# Altium PCB IMX6WBED.PcbDoc (part 3 of 10)
Units mil, origin at the board's own origin, x right, y up, seen from the top; angles counter-clockwise.
Board outline 3318.23 x 4815.16 mil, 6 copper layers (Top Layer, L2_GND_1, L3_INT_1, L6_INT_2, L7_PWR_2, Bottom Layer), stack 27.7 mil thick; 504 components, 400 nets, 2357 pads, 1199 vias.
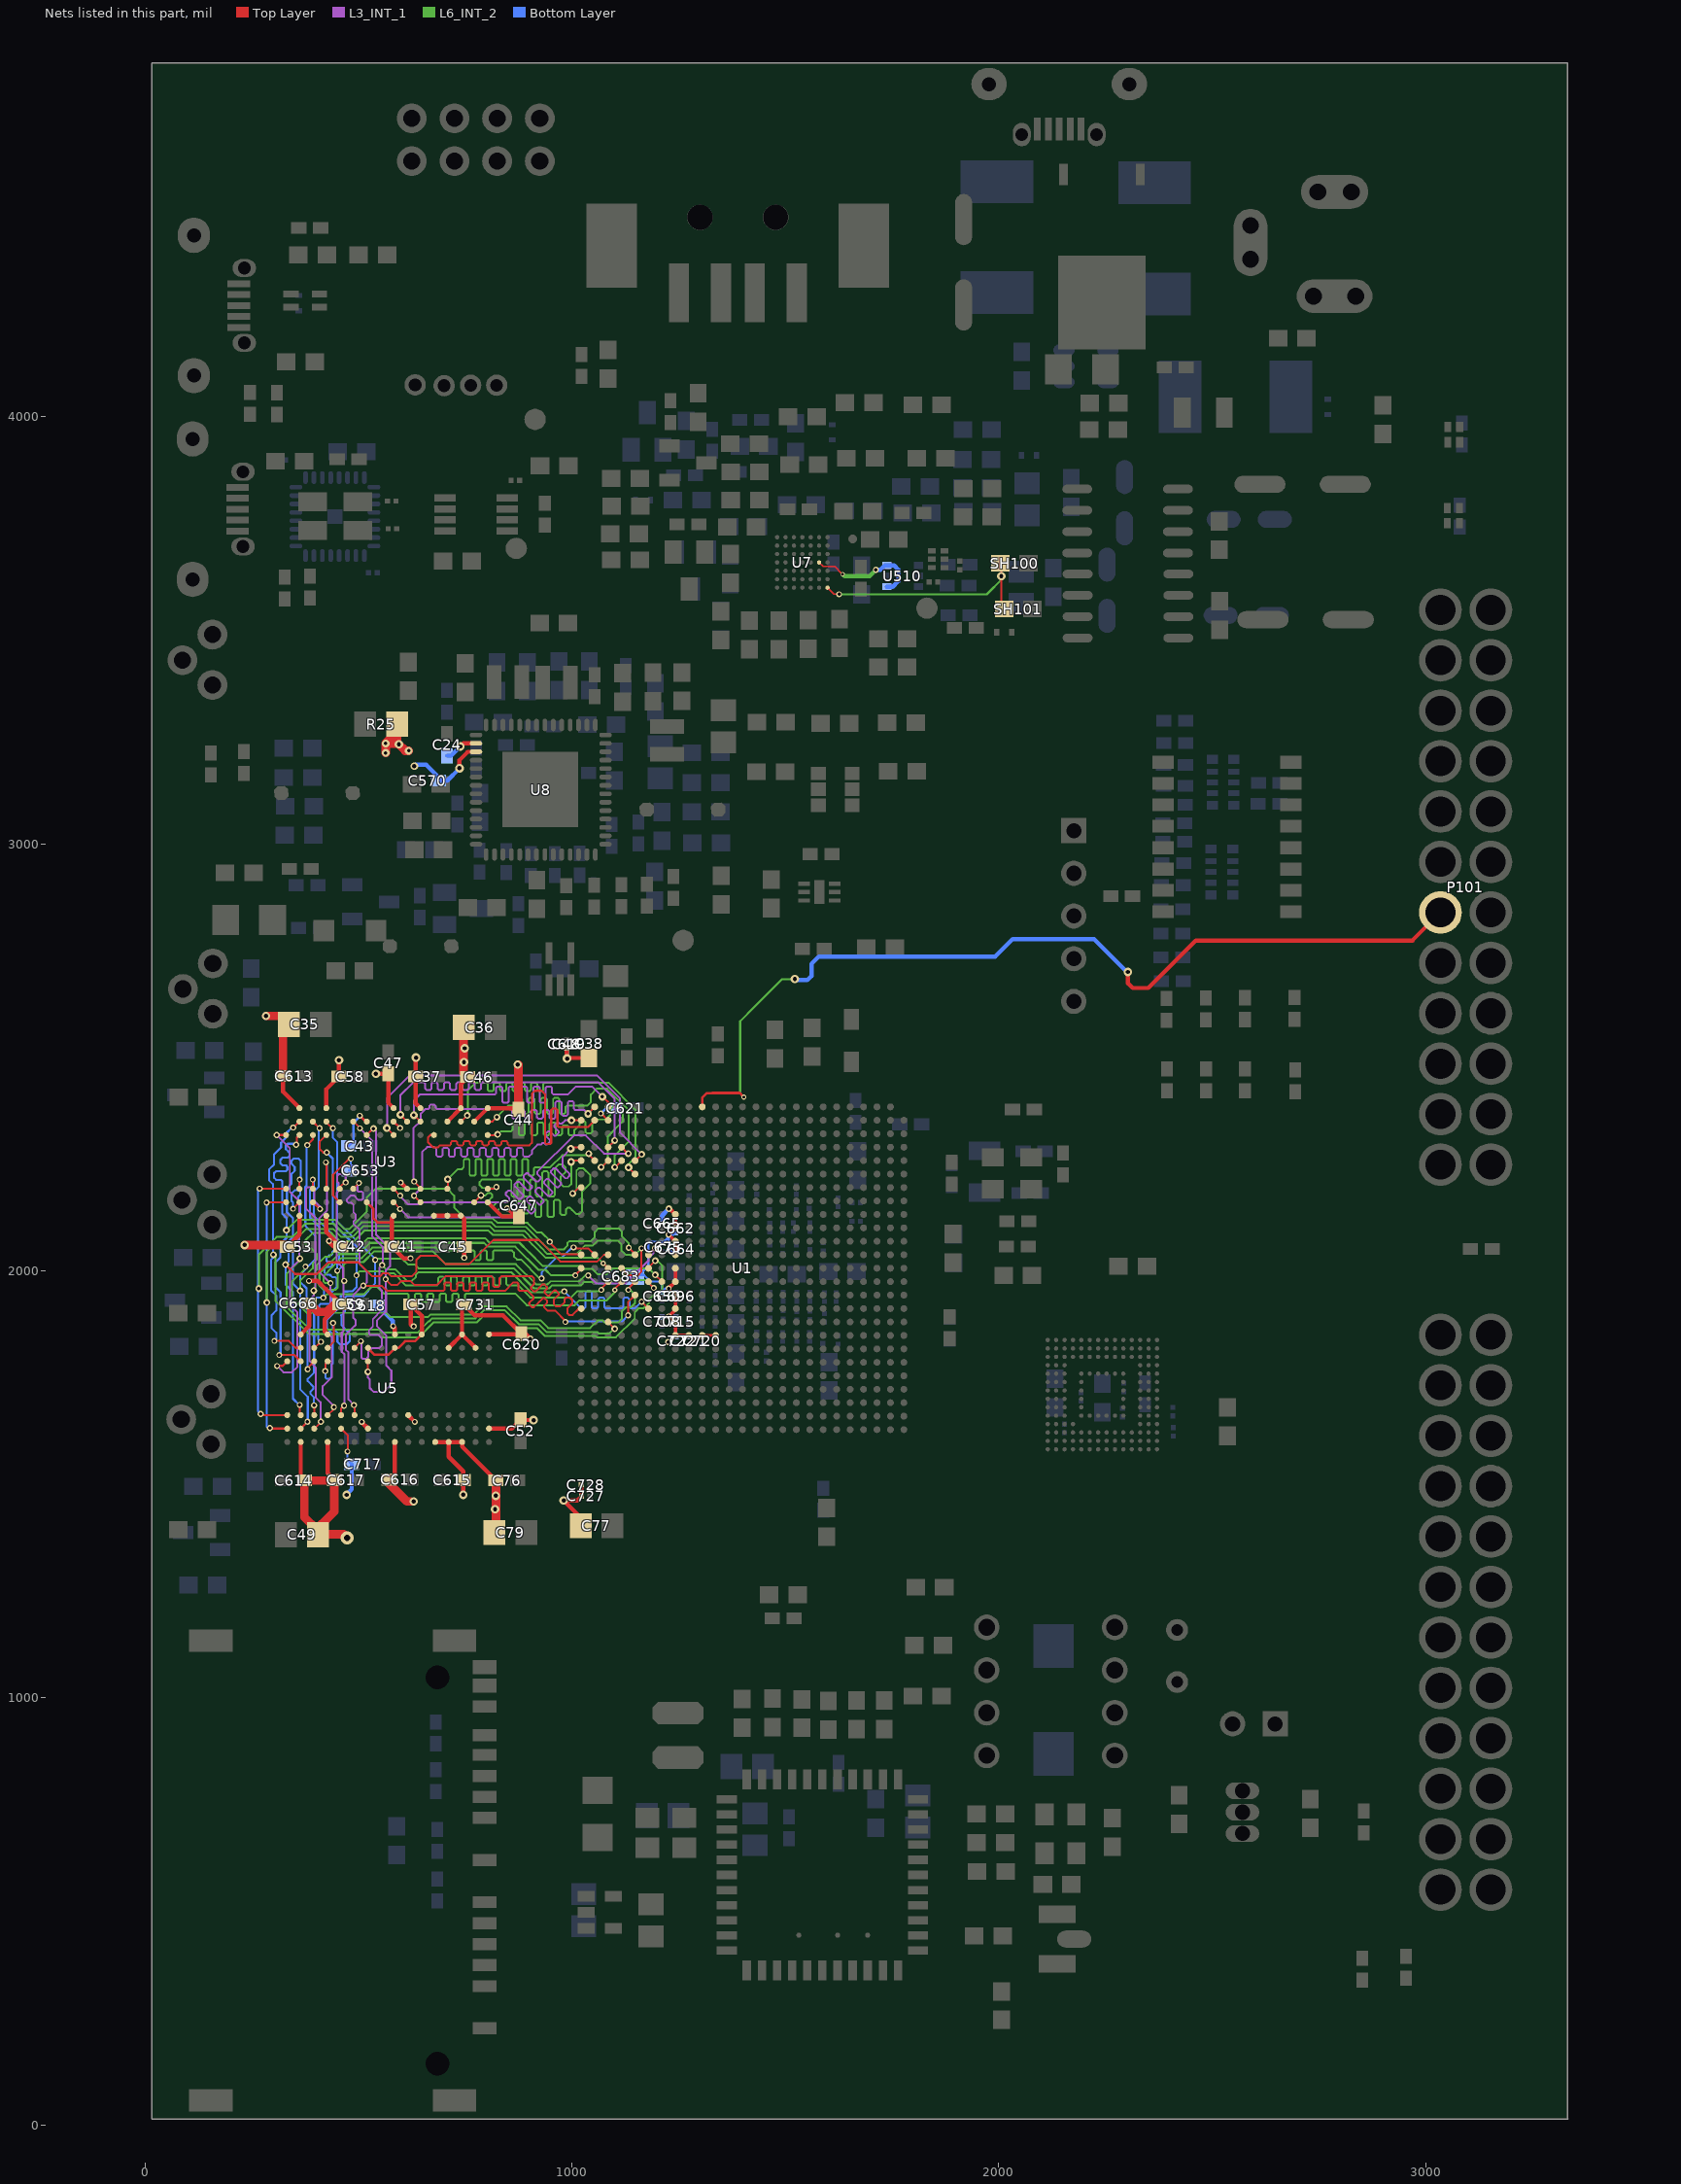
[diagram p7: the nets of this part, all layers, seen from the top]

## Via types
v1: diameter 14, hole 8, Top Layer to Bottom Layer, 296 vias
v2: diameter 14, hole 8, Top Layer to Bottom Layer, tented both sides, 244 vias
v3: diameter 20, hole 10, Top Layer to Bottom Layer, 221 vias
v4: diameter 20, hole 10, Top Layer to Bottom Layer, tented both sides, 112 vias
v5: diameter 18, hole 8, Top Layer to Bottom Layer, tented both sides, 74 vias
v6: diameter 12, hole 6, Top Layer to Bottom Layer, tented both sides, 60 vias
v7: diameter 16, hole 8, Top Layer to Bottom Layer, 59 vias
v8: diameter 30, hole 15, Top Layer to Bottom Layer, 33 vias
v9: diameter 40, hole 20, Top Layer to Bottom Layer, 16 vias
v10: diameter 30, hole 15, Top Layer to Bottom Layer, tented both sides, 16 vias
v11: diameter 18, hole 8, Top Layer to Bottom Layer, 16 vias
v12: diameter 12, hole 6, Top Layer to Bottom Layer, 13 vias
v13: diameter 16, hole 8, Top Layer to Bottom Layer, tented both sides, 8 vias
v14: diameter 80, hole 40, Top Layer to Bottom Layer, 5 vias
v15: diameter 14, hole 6, Top Layer to Bottom Layer, tented both sides, 4 vias
v16: diameter 50, hole 30, Top Layer to Bottom Layer, 3 vias
v17: diameter 16, hole 10, Top Layer to Bottom Layer, 3 vias
v18: diameter 25, hole 15, Top Layer to Bottom Layer, tented both sides, 3 vias
v19: diameter 35, hole 20, Top Layer to Bottom Layer, tented both sides, 3 vias
v20: diameter 10, hole 6, Top Layer to Bottom Layer, 3 vias
v21: diameter 18, hole 10, Top Layer to Bottom Layer, tented both sides, 2 vias
v22: diameter 80, hole 45, Top Layer to Bottom Layer, 1 vias
v23: diameter 40, hole 20, Top Layer to Bottom Layer, tented both sides, 1 vias
v24: diameter 11, hole 6, Top Layer to Bottom Layer, tented both sides, 1 vias
v25: diameter 13, hole 6, Top Layer to Bottom Layer, tented both sides, 1 vias
v26: diameter 14, hole 6, Top Layer to Bottom Layer, 1 vias

## Nets (pads, with @x,y where several pads share a name; then routed paths per layer and width w, separated by ;. In a path a pad name is that pad's centre, name@x,y a point inside that pad or via, vN(x,y) a via of type N, cw(c..) or ccw(c..) an arc to the next point about the centre after c; other vN are vias at no path point) (continued)
DDR_1V5: C24.2 C35.2 C36.2 C37.2 C38.2 C41.2 C42.2 C43.2 C44.2 C45.2 C46.2 C48.2 C49.2 C52.2 C53.2 C57.2 C58.2 C59.2 C76.2 C77.2 C79.2 C613.2 C614.2 C615.2 C616.2 C617.2 C619.2 C620.2 C647.2 C650.2 C662.2 C664.2 C665.2 C666.2 C675.2 C683.2 C696.2 C708.2 C715.2 C720.2 C721.2 C722.2 C727.2 C728.2 C731.2 R25.2 U1.R18 U1.T18 U1.U18 U1.V9 U1.V10 U1.V11 U1.V12 U1.V13 U1.V14 U1.V15 U1.V16 U1.V17 U1.V18 U3.A1 U3.A8 U3.B2 U3.C1 U3.C9 U3.D2 U3.D9 U3.E9 U3.F1 U3.G7 U3.H2 U3.H9 U3.K2 U3.K8 U3.N1 U3.N9 U3.R1 U3.R9 U5.A1 U5.A8 U5.B2 U5.C1 U5.C9 U5.D2 U5.D9 U5.E9 U5.F1 U5.G7 U5.H2 U5.H9 U5.K2 U5.K8 U5.N1 U5.N9 U5.R1 U5.R9 U8.30 | length 5853.5
  Top Layer w5: v1(1226.19,1958.8) U1.V15@1242.04,1942.96
  Top Layer w6: v1(502.81,2363.06) 516.47,2349.4 U3.K2@519.01,2349.4 ; U3.K8@519.01,2160.43 534.71,2144.72 534.71,2122.77 544.33,2113.15 577.88,2113.15 ; U5.K2@522.01,1819.4 538.01,1803.4 568.99,1803.4 U5.H2@585,1819.4 593.28,1819.4 608.83,1834.95 632.04,1834.95 U5.F1@647.99,1850.9 ; U3.H2@582,2349.4 v1@597.28,2334.12 ; U5.C1@742.36,1851.02 U5.C1@742.48,1850.9 ; U1.U18@1273.53,1848.47 v1@1285.53,1836.47 ; v1(1288.91,1837.93) 1288.91,1836.69 1289.13,1836.47 1293.03,1836.47 U1.T18@1305.03,1848.47 U1.R18@1336.53,1848.47
  Top Layer w8: v2(1225.12,1833.13) 1226.7,1833.13 U1.V18@1242.04,1848.47 ; v1(1226.19,1958.8) 1241.84,1974.45 U1.V14@1242.04,1974.45 U1.V13@1242.04,2005.95 ; U1.V18@1237.41,1848.47 U1.V18@1242.04,1848.47 ; U1.V15@1242.04,1942.96 U1.V16@1242.04,1911.46 1242.04,1908.51 v2(1226.72,1893.19) 1239.95,1879.96 U1.V17@1242.04,1879.96 U1.V18@1242.04,1848.47 ; U1.V12@1242.04,2043.23 U1.V12@1242.04,2037.44 U1.V11@1242.04,2068.94 v2(1226.29,2084.69) U1.V10@1242.04,2100.44 ; U1.U18@1273.53,1848.47 U1.V18@1242.04,1848.47
  Top Layer w10: C613.2@322.88,2455.9 322.88,2419.55 U3.R1@361.53,2380.9 ; C53.2@332.88,2055.9 361.53,2084.55 U3.R9@361.53,2128.93 ; U5.R9@364.53,1598.93 364.53,1517.43 C614.2@373.06,1508.9 ; U5.R1@364.53,1850.9 384.06,1870.43 C666.2@384.06,1923.9 ; v1@386.56,1976.67 403.67,1976.67 423.61,1956.73 423.81,1956.73 455.88,1924.66 C59.2@455.88,1921.9 420.58,1886.6 420.58,1857.84 U5.N1@427.52,1850.9 ; U3.N9@424.52,2128.93 424.52,2090.26 C42.2@457.88,2056.9 441.31,2056.9 v1@428.39,2069.82 ; U3.N1@424.52,2380.9 424.52,2425.54 C58.2@453.88,2454.9 453.88,2490.65 v3@454.19,2490.96 ; U5.N9@427.52,1598.93 427.52,1526.26 C617.2@443.88,1509.9 ; v1@506.42,1646.01 U5.K8@522.01,1630.43 ; C616.2@566.36,1506.39 585,1525.02 U5.H9@585,1598.93 ; U3.H9@582,2128.93 577.88,2124.81 577.88,2113.15 C41.2@577.88,2056.9 605.85,2028.93 v1@621.19,2028.93 ; v1@600.21,2205.49 613.49,2192.21 U3.G7@613.49,2191.92 ; U5.G7@616.49,1661.92 616.49,1661.41 v1(631.91,1645.99) ; v3@621.95,1459.83 v3(629.01,1459.83) ; v1@626.97,1868.9 621.88,1873.99 C57.2@621.88,1920.9 647.99,1894.79 U5.F1@647.99,1850.9 ; v3@634.57,2499.44 633.88,2498.75 C37.2@633.88,2454.9 633.88,2392.01 U3.F1@644.99,2380.9 ; U3.E9@676.49,2128.93 U3.D9@707.98,2128.93 U3.C9@739.48,2128.93 747.06,2121.35 C45.2@747.06,2055.9 v1@747.06,2034.83 ; U5.E9@679.49,1598.93 U5.D9@710.98,1598.93 ; U3.D2@707.98,2349.4 U3.C1@739.48,2380.9 739.48,2437.5 C46.2@755.88,2453.9 ; U5.D2@710.98,1819.4 U5.C1@742.48,1850.9 U5.B2@773.97,1819.4 ; v4(738.47,3227.9) 745.69,3235.12 U8.30@775.19,3235.12 ; U5.C1@742.36,1851.02 742.36,1916.38 C731.2@746.88,1920.9 772.43,1895.35 838.61,1895.35 C620.2@881.47,1852.49 ; v3@745.06,1474.22 C615.2@745.06,1509.9 745.06,1530.6 710.98,1564.68 U5.D9@710.98,1598.93 ; U3.B2@770.97,2349.4 U3.A1@802.47,2380.9 872.06,2380.9 C44.2@874.47,2378.49 ; U3.A8@802.47,2160.43 835.59,2127.31 C647.2@868.74,2127.31 ; U5.A8@805.47,1630.43 859.41,1630.43 C52.2@879.47,1650.49 v3@906.98,1650.49 ; U5.A1@805.47,1850.9 879.88,1850.9 C620.2@881.47,1852.49 ; C76.2@821.88,1508.9 742.48,1588.3 U5.C9@742.48,1598.93 U5.D9@710.98,1598.93 ; v1@850.85,2145.2 C647.2@868.74,2127.31 ; C647.2@875.47,2127.31 C647.2@868.74,2127.31 ; C620.2@891.11,1842.85 C620.2@881.47,1852.49 ; v1@902.21,1841.48 891.2,1852.49 C620.2@881.47,1852.49 ; C48.2@987.47,2520.9 v4@987.47,2497.9 ; v4(988.47,2496.9) v4@987.47,2497.9 ; C77.2@1020.07,1402.9 1020.07,1422.3 v4(980.47,1461.9) 1012.47,1461.9 C727.2@1022.47,1471.9 1021.47,1472.9 C728.2@1021.47,1498.9 ; C38.2@1039.47,2498.44 988.01,2498.44 v4@987.47,2497.9 ; v13(1226.67,2145.34) 1228.63,2145.34 U1.V9@1242.04,2131.93 U1.V10@1242.04,2100.44
  Top Layer w20: v3@233.25,2060.36 C53.2@328.42,2060.36 ; v4(283.16,2596.97) 317,2596.97 C35.2@337.07,2576.9 322.88,2562.71 C613.2@322.88,2455.9 ; C53.2@328.18,2060.6 C53.2@328.42,2060.36 ; C53.2@332.88,2055.9 C53.2@328.42,2060.36 ; C666.2@384.06,1923.9 404.47,1903.49 425.63,1903.49 444.04,1921.9 C59.2@455.88,1921.9 ; C49.2@401.29,1394.67 373.06,1422.9 C614.2@373.06,1508.9 C617.2@442.88,1508.9 ; C617.2@443.88,1509.9 C617.2@442.88,1508.9 ; v8@472.71,1375.43 465,1383.14 390.11,1383.14 442.88,1435.91 C617.2@442.88,1508.9 ; v5(563.47,3212.9) v5(563.47,3234.9) ; C616.2@566.36,1506.39 612.92,1459.83 v3@621.95,1459.83 ; v5(617.47,3217.9) 609.47,3217.9 v4(594.47,3232.9) ; C36.2@746.07,2569.9 746.07,2463.71 C46.2@755.88,2453.9 ; C79.2@818.07,1386.9 821.88,1390.71 C76.2@821.88,1508.9 ; C44.2@874.47,2378.49 v3@874.47,2482.37 ; v5(563.47,3234.9) 592.47,3234.9 v4(594.47,3232.9) ; v5(563.47,3234.9) 589.87,3261.3 R25.2@589.87,3279.9 589.87,3237.5 v4(594.47,3232.9)
  Bottom Layer w5: C683.2@1146.93,1990.9 C683.2@1161.62,1976.21 ; C683.2@1147.93,1991.9 1159.32,1991.9 1178.63,2011.21 1178.63,2063.05 1183.43,2067.85 1187.92,2067.85 ; C683.2@1157.42,1990.18 1168.76,1990.18 1184.34,1974.6 1203.93,1974.6 1210.47,1968.06 C650.2@1210.47,1949.9 1219.27,1958.7 v1@1226.29,1958.7 ; 1189.68,2067.85 1209.52,2067.85 C675.2@1212.47,2064.9 ; v1(1226.19,1958.8) v1@1226.29,1958.7 ; C696.2@1243.47,1949.9 1235.09,1949.9 v1@1226.29,1958.7
  Bottom Layer w6: C43.2@476.88,2291.9 488.25,2303.27 488.25,2347.34 v1@503.01,2362.1 ; C675.2@1212.47,2064.9 v2@1226.29,2078.72 ; v2@1228.89,1836.9 1235.66,1843.67 1242.24,1843.67 C722.2@1243.47,1844.9 C722.2@1240.98,1844.9 ; C662.2@1242.47,2088.9 1238.26,2084.69 v2(1226.29,2084.69) v2@1226.29,2078.72 ; C664.2@1243.47,2039.9 1238.77,2039.9 1226.29,2052.38 v2@1226.29,2078.72 ; C721.2@1273.47,1844.9 1283.68,1844.9 1288.66,1839.92 1294.64,1845.9 C720.2@1304.47,1845.9
  Bottom Layer w8: 1217.47,1890.9 v2@1224.43,1890.9 ; v2@1229.01,1890.9 C715.2@1243.47,1890.9
  Bottom Layer w10: C24.2@707.47,3206.31 716.88,3206.31 v4(738.47,3227.9) ; C619.2@987.47,2520.9 987.47,2497.9 v4(988.47,2496.9) ; C665.2@1211.49,2121.92 C665.2@1210.47,2120.9 1210.47,2129.14 v13(1226.67,2145.34)
  other v1: 507.27,1646.02 902.27,1841.46 629.05,1869.8 383.81,1976.14 621.68,2029.3 747.37,2030.42 430.58,2069.9 848.1,2146.24 598.89,2206.71 597.27,2334.4
  other v3: 819.63,1441.54 821.64,1473.1 745.04,1475.38 909.9,1650.11 232.78,2060.32 872.75,2483.07 746.8,2488.71 454.19,2493.14 634.34,2499.21 748.44,2520.98
  other v8: 473.2,1374.45
DDR_VREF: C47.2 C570.2 C618.2 C621.2 C653.2 C717.2 U1.AC2 U3.H1 U3.M8 U5.H1 U5.M8 U8.31 | length 786.5
  Top Layer w5: U3.M8@456.01,2160.43 440.13,2176.31 440.13,2224.94 476.45,2261.26 v1@481.73,2261.26 ; U5.M8@459.01,1630.43 474.78,1614.66 v1@474.78,1576.43 ; v1@1067.87,2369.09 U1.AC2@1084.56,2352.4
  Top Layer w10: v3@541.62,2460.8 542.13,2461.31 C47.2@569.47,2461.31 569.47,2393.43 U3.H1@582,2380.9 ; v1(580.76,1870.32) 585,1866.08 U5.H1@585,1850.9 ; v4(736.47,3176.9) 736.47,3196.04 755.86,3215.43 U8.31@775.19,3215.43
  Bottom Layer w5: v1(473.95,1576.71) 473.95,1556.83 C717.2@483.88,1546.9 ; C653.2@477.88,2234.9 481.96,2238.98 v1(481.96,2262.4) ; v1(1067.7,2368.37) 1080.23,2380.9 C621.2@1098.88,2380.9
  Bottom Layer w10: v3@472.79,1476.86 483.88,1487.95 C717.2@483.88,1546.9 ; C618.2@544.06,1918.9 580.4,1882.56 v1@580.4,1873.64 ; v21(630.47,3181.9) 633.4,3184.83 658.56,3184.83 687.06,3156.33 C570.2@687.06,3147.9 707.47,3147.9 v4(736.47,3176.9)
  other v3: 472.06,1475.16 540.59,2461.24
DHT11: P101.13 U1.T1 | length 2179.9
  Top Layer w6: U1.T1@1305.03,2383.9 1305.03,2405.46 1315.77,2416.2 1329.37,2416.2 ; 1329.42,2416.25 1393.12,2416.25 v6@1400.47,2408.9
  Top Layer w10: v3(2302.28,2699.77) 2302.28,2673.42 2313.52,2662.18 2350.17,2662.18 2461.62,2773.63 2968.86,2773.63 P101.13@3034.47,2839.24
  L6_INT_2 w4.7: v6(1402.47,2406.9) 1393.99,2415.38 1393.99,2584.48 1428.41,2618.9 1428.47,2618.9 1492.47,2682.9 v3@1522.7,2682.9
  Bottom Layer w10: v3(1521.93,2683.29) 1524.41,2680.81 1551.41,2680.81 1560.92,2690.32 1560.92,2718.49 1578.49,2736.06 1991.58,2736.06 2032.07,2776.55 2223.2,2776.55 2300.6,2699.15 v3@2301.04,2699.15
DMIC_DAT: SH100.2 SH101.2 U7.G1 | length 552.6
  Top Layer w3: U7.G1@1598.55,3599.9 1613.98,3584.47 v1@1625.44,3584.47
  Top Layer w5: SH100.2@2010.01,3656.9 2005.79,3652.68 v3(2005.79,3626.97) 2005.79,3556.12 SH101.2@2012.01,3549.9
  L6_INT_2 w5: v1(1625.74,3584.32) 1949.29,3584.32 1971.67,3584.32 2008.33,3620.98 2008.33,3630.41 v3@2007.78,3630.96
DMICCLK: U7.F4 U510.1 U510.3 | length 274.6
  Top Layer w3: U7.F4@1578.87,3658.94 1588.37,3649.44 1615.4,3649.44 v20@1632.91,3631.93
  L6_INT_2 w3: v20(1633.64,3631.73) v20@1635.02,3630.35 ; v1(1711.99,3641.59) v1@1713.67,3643.33
  L6_INT_2 w10: v20@1635.02,3630.35 1638.52,3626.85 1697.25,3626.85 v1(1711.99,3641.59)
  Bottom Layer w10: v1(1711.99,3641.59) 1722.35,3641.59 1732.66,3651.9 U510.3@1737.47,3651.9 1754.62,3651.9 1764.66,3641.86 1764.66,3615.23 1751.33,3601.9 U510.1@1737.47,3601.9
DRAM_A0: U1.AC14 U3.N3 U5.N3 | length 1558.6
  Top Layer w4.7: v1(422.02,1765.19) 422.02,1782.41 U5.N3@427.52,1787.91 U5.N3@427.57,1787.91 ; U3.N3@424.52,2317.91 408.7,2302.09 408.7,2285.47 417.3,2276.87 v1(425.34,2276.87) ; v2@1068.82,1958.71 U1.AC14@1084.56,1974.45
  L6_INT_2 w4.5: v1@492.09,1987.82 503,1998.73 556.17,1998.73 560.6,1994.3 581.96,1994.3 610.18,1966.08 684,1966.08 686.9,1968.98 686.9,1983.18 689.8,1986.08 698.5,1986.08 701.4,1983.18 701.4,1968.98 704.3,1966.08 713,1966.08 715.9,1968.98 715.9,1983.18 718.8,1986.08 727.5,1986.08 730.4,1983.18 730.4,1968.98 733.3,1966.08 742,1966.08 744.9,1968.98 744.9,1983.18 747.8,1986.08 756.5,1986.08 759.4,1983.18 759.4,1968.98 762.3,1966.08 771,1966.08 773.9,1968.98 773.9,1983.18 776.8,1986.08 785.5,1986.08 788.4,1983.18 788.4,1968.98 791.3,1966.08 800,1966.08 802.9,1968.98 802.9,1983.18 805.8,1986.08 814.5,1986.08 817.4,1983.18 817.4,1968.98 820.3,1966.08 829,1966.08 831.9,1968.98 831.9,1983.18 834.8,1986.08 843.5,1986.08 846.4,1983.18 846.4,1968.98 849.3,1966.08 873.36,1966.08 901.79,1937.65 976.94,1937.65 977.03,1937.74 998.12,1937.74 1012.66,1952.28 1064.38,1952.28 1066.25,1954.15 1066.25,1957.41 1068.32,1958.15 1068.82,1958.33 1069.09,1958.06 v2@1069.09,1957.19
  Bottom Layer w4.7: v1(422.02,1765.19) 422.02,1750.44 425.51,1746.95 431.99,1746.95 435.97,1750.93 435.97,1779.14 439.52,1782.69 439.52,1851.52 425.39,1865.65 425.39,1884.88 458.42,1917.91 458.42,1941.57 468.24,1951.39 474.82,1951.39 474.95,1951.52 485.01,1951.52 495.29,1961.8 v1(495.29,1989.52) ; v1(425.34,2276.87) 439.49,2262.72 439.49,2111.27 495.29,2055.47 v1(495.29,1989.52) ; v1@493.83,1988.06 v1(495.29,1989.52)
  other v2: 1068.83,1955.28
DRAM_A1: U1.AB14 U3.P7 U5.P7 | length 1538.1
  Top Layer w4.7: U3.P7@393.02,2191.92 v1@393.02,2210.08 ; U5.P7@396.02,1661.92 v1@396.02,1683.05 ; v6@1100.78,1956.06 1100.78,1957.91 1100.52,1958.17 1116.05,1973.7 U1.AB14@1116.05,1974.45
  L6_INT_2 w4.7: v1@418.39,1937.12 426.62,1945.35 513.04,1945.35 530.01,1962.32 543.46,1962.32 559.11,1946.67 613.93,1946.67 616.87,1943.73 616.87,1929.61 619.81,1926.67 628.63,1926.67 631.57,1929.61 631.57,1943.73 634.51,1946.67 643.33,1946.67 646.27,1943.73 646.27,1929.61 649.21,1926.67 658.03,1926.67 660.97,1929.61 660.97,1943.73 663.91,1946.67 672.73,1946.67 675.67,1943.73 675.67,1929.61 678.61,1926.67 687.43,1926.67 690.37,1929.61 690.37,1943.73 693.31,1946.67 702.13,1946.67 705.07,1943.73 705.07,1929.61 708.01,1926.67 716.83,1926.67 719.77,1929.61 719.77,1943.73 722.71,1946.67 731.53,1946.67 734.47,1943.73 734.47,1929.61 737.41,1926.67 746.23,1926.67 749.17,1929.61 749.17,1943.73 752.11,1946.67 866.61,1946.67 894.13,1919.15 984.6,1919.15 ; 984.69,1919.24 1005.78,1919.24 1017.27,1930.73 1081.44,1930.73 1100.52,1949.81 1100.52,1955.98 1100.6,1956.06 v6@1100.78,1956.06
  Bottom Layer w4.7: v1(395.6,1684.85) 395.6,1703.39 387.49,1711.5 387.49,1717.37 394.06,1723.94 394.06,1728.59 380.82,1741.83 380.82,1746.89 395.6,1761.67 395.6,1776.67 ; v1@395.6,2210.67 395.6,2198.89 386.21,2189.5 386.21,2124.1 408.75,2101.56 ; 395.78,1776.85 395.78,1931.56 401.34,1937.12 v1(417.5,1937.12) ; 408.81,2101.56 408.81,1965.55 418.05,1956.31 ; v1@418.88,1937.12 418.88,1956.31
  other v1: 392.86,2213.41
  other v6: 1100.29,1955.1
DRAM_A2: U1.AA14 U3.P3 U5.P3 | length 1640.5
  Top Layer w4.5: v1@1131.52,1957.67 1147.55,1973.7 U1.AA14@1147.55,1974.45
  Top Layer w4.7: v1(379.91,2294.23) 393.02,2307.34 U3.P3@393.02,2317.91 ; v1@382.09,1773.98 U5.P3@396.02,1787.91
  L6_INT_2 w4.5: v1@377.07,2007.58 344.33,1974.84 344.33,1936.03 379.01,1901.35 563.78,1901.35 573.97,1891.16 662.17,1891.16 668.57,1897.56 769.92,1897.56 788.76,1916.4 846.8,1916.4 879.29,1883.91 925.83,1883.91 944,1865.74 1042.56,1865.74 1060.23,1883.41 1063.49,1883.41 1063.57,1883.33 1072.02,1883.33 1075.84,1879.51 1109.38,1879.51 1117.11,1887.24 1117.11,1905.51 1126.01,1914.41 1137.47,1914.41 1147.56,1924.5 1147.56,1944.46 1136.87,1955.15 v1(1131.72,1955.15) ; v1@1131.44,1955.43 v1@1131.52,1955.51
  Bottom Layer w4.7: v1@378.04,2292.36 378.04,2199.43 375.25,2196.64 375.25,2105.35 398.42,2082.18 398.42,2026.86 v1@381.35,2009.79 ; v1@379.04,2006.39 363.1,1990.45 363.1,1974.03 378.21,1958.92 378.21,1910.72 380.78,1908.15 v1(380.78,1769.38)
  other v1: 375.64,2009.79
DRAM_A3: U1.Y14 U3.N2 U5.N2 | length 1516.7
  Top Layer w4.7: U3.N2@424.52,2349.4 424.52,2347.96 v1@437.39,2335.09 ; U5.N2@427.52,1822.03 U5.N2@427.52,1819.4 442.29,1834.18 v1@442.29,1875.64 ; U1.Y14@1179.05,1974.45 1179.05,1971.98 v1@1190.88,1960.15
  L6_INT_2 w4.5: v1@539.32,2024.73 542.84,2028.25 602.27,2028.25 615.58,2014.94 631.29,2014.94 640.74,2005.49 680.65,2005.49 ; 680.78,2005.62 864.02,2005.62 910.8,1958.84 946.47,1958.84 953.8,1966.17 1021.42,1966.17 1029.01,1973.76 1055.41,1973.76 1058.83,1970.34 1080.62,1970.34 1087.53,1977.25 1108.95,1977.25 1119.83,1988.13 1119.83,1991.89 1123.72,1995.78 1133.28,1995.78 1140.01,1989.05 1140.01,1983.82 1145.53,1978.3 1173.57,1978.3 v1@1191.05,1960.82
  Bottom Layer w4.7: v1(440.15,1877.78) 440.15,1865 450.43,1854.72 450.43,1833.67 456.25,1827.85 471.97,1827.85 479.39,1835.27 479.39,1852.78 459.67,1872.5 459.67,1895.37 459.32,1895.72 468.06,1904.45 468.06,1936.27 472.33,1940.54 511.38,1940.54 523.03,1952.19 523.03,1955.38 538.78,1971.13 v1(538.78,2025.27) ; v1@444.45,2331.96 v1(439.93,2333.7) 439.93,2311.32 449.52,2301.73 449.52,2116.65 538.78,2027.39 v1(538.78,2025.27) ; v1@538.78,2027.28 v1(538.78,2025.27)
  other v1: 1191.6,1959.92
DRAM_A4: U1.W14 U3.P8 U5.P8 | length 1640.5
  Top Layer w4.5: v7(1195.16,1990.49) 1210.54,1975.11 U1.W14@1210.54,1974.45
  Top Layer w5: U3.P8@393.02,2160.43 v1@408.11,2145.34 ; U5.P8@396.02,1630.43 396.75,1630.43 v1@411.72,1645.4
  L3_INT_1 w4.5: v1(409.66,2144.63) 409.66,2150.91 395.92,2164.65 395.92,2184.25 396.02,2184.35 396.02,2191.24 391.58,2195.68 380.99,2195.68 376.56,2191.25 376.56,2146.54 398.59,2124.51 398.59,2015.88 398.51,2015.8 398.51,1961.8 394.99,1958.28 v7(394.99,1953.58) 394.99,1941.92 385.08,1932.01 385.08,1788.47 399.66,1773.88 399.66,1703.41 410.79,1692.28 410.79,1647 v1(411.53,1646.26)
  L6_INT_2 w4.5: v7(394.99,1953.58) 398.57,1957.16 398.57,1998.8 401.96,2002.19 401.96,2013.05 422.18,2033.27 431.53,2033.27 449.43,2051.17 497.3,2051.17 522.33,2076.2 792.36,2076.2 792.44,2076.28 795.96,2076.28 806.42,2065.82 876.59,2065.82 899.17,2043.24 899.38,2043.24 930.94,2011.68 1018.51,2011.68 1025.7,2004.49 1047.37,2004.49 1060.22,1991.64 1080.8,1991.64 1094.58,2005.42 1127.72,2005.42 1127.76,2005.46 1180.19,2005.46 v7(1195.16,1990.49)
DRAM_A5: U1.AE13 U3.P2 U5.P2 | length 1577
  Top Layer w4.7: U5.P2@396.02,1819.4 397.3,1819.4 v1(411.54,1833.64) ; v1@1008.1,1990.6 1021.57,2004.07 U1.AE13@1021.57,2005.95
  Top Layer w5: U3.P2@393.02,2349.4 408.58,2333.85 v1(408.71,2333.85)
  L6_INT_2 w4.7: v1@451.08,1998.99 451.08,1960.34 446.43,1955.69 417.89,1955.69 408.28,1965.3 408.28,1993.68 453.61,2039.01 500,2039.01 526.21,2065.22 793.87,2065.22 802.57,2056.52 866.93,2056.52 921.42,2002.03 938.1,2002.03 950.74,1989.39 v1(1007.88,1989.39)
  Bottom Layer w4.7: v1(408.71,2333.85) 406.95,2332.09 406.95,2196.95 395.61,2185.61 395.61,2127.99 412.64,2110.96 412.7,2110.96 463.13,2060.53 463.13,2011.59 v1@450.8,1999.26 ; v1(411.54,1833.64) 405.18,1840 405.18,1895.4 410.5,1900.71 410.5,1905.73 407.33,1908.9 407.33,1918.81 410.82,1922.3 432.08,1922.3 436.21,1926.43 436.21,1949.72 449.09,1962.6 449.09,1981.3 445.55,1984.84 438.6,1984.84 432.79,1990.65 425.32,1990.65 420.01,1995.96 420.01,2003.63 425.02,2008.64 434.62,2008.64 437.8,2011.82 437.8,2019.05 435.64,2021.21 427.17,2021.21 424.77,2023.61 424.77,2029.91 430.67,2035.81 435.61,2035.81 438.66,2038.86 438.66,2044.28 442.62,2048.24 448.86,2048.24 453.89,2043.21 453.89,2019.76 449.55,2015.42 449.55,2000.52 v1(449.95,2000.12)
DRAM_A6: U1.AC13 U3.R8 U5.R8 | length 1593.1
  Top Layer w4.5: v12@1072.21,2018.3 U1.AC13@1084.56,2005.95 U1.AC13@1084.56,2008.57
  Top Layer w4.7: v1@346.79,2145.69 U3.R8@361.53,2160.43 ; U5.R8@364.53,1630.43 380.33,1646.23 v1(380.33,1646.44)
  L6_INT_2 w4.7: v7(363.16,1952.69) 363.16,1976.54 392.66,2006.04 392.66,2016.9 401.4,2025.64 401.4,2040.07 389.03,2052.44 384.74,2052.44 375.85,2061.33 375.85,2071.96 392.31,2088.42 437.09,2088.42 455.84,2069.67 489.64,2069.67 514.67,2094.7 784.69,2094.7 784.77,2094.78 803.62,2094.78 814.08,2084.32 884.25,2084.32 906.83,2061.74 907.04,2061.74 938.6,2030.18 1060.33,2030.18 v12(1072.98,2017.53)
  Bottom Layer w4.7: v1(346.38,2145.14) 346.38,2160.11 342.84,2163.65 342.84,2181.08 350.34,2188.58 359.63,2188.58 362.98,2185.23 362.98,2177.38 358.48,2172.88 358.48,2162.47 362.98,2157.97 362.98,2130.57 359.8,2127.39 359.8,2072.52 346.21,2058.93 346.21,1969.96 v7@363.08,1953.09 ; v7(363.16,1952.69) 363.16,1953.01 v7@363.08,1953.09 ; v1@380.98,1645.47 380.98,1704.62 363.08,1722.52 v7@363.08,1953.09
DRAM_A7: U1.Y13 U3.R2 U5.R2 | length 1862.7
  Top Layer w4.5: U1.Y13@1179.05,2005.95 U1.Y13@1179.05,2007.5
  Top Layer w4.7: 310.76,1835.43 336.87,1835.43 347.08,1825.22 ; 347.08,1825.14 352.82,1819.4 U5.R2@364.53,1819.4 ; v1@347.97,2335.85 U3.R2@361.53,2349.4 ; U1.Y13@1179.05,2007.5 v7(1194.83,2023.28)
  L6_INT_2 w4.5: v7@305.6,2032.66 305.6,1929.17 382.84,1851.93 545.01,1851.93 552.64,1844.3 641.33,1844.3 676.19,1879.16 777.54,1879.16 796.38,1898 838.39,1898 870.88,1865.51 918.21,1865.51 936.38,1847.34 1055.19,1847.34 1058.34,1844.19 1074.26,1844.19 1074.36,1844.09 1103.06,1844.09 1146.96,1887.99 1146.96,1889.56 ; 1146.94,1889.58 1146.94,1902.8 1156.28,1912.14 1167.86,1912.14 1180.32,1924.6 1180.32,1932.45 1190.65,1942.78 1197.55,1942.78 1211.52,1956.75 1211.52,1998.26 1211.45,1998.33 1211.45,2012.05 1200.22,2023.28 v7(1194.83,2023.28)
  Bottom Layer w4.7: v7@301.76,2032.51 294.85,2025.6 294.85,1954.27 307.07,1942.05 307.07,1906.94 296.42,1896.29 296.42,1865.28 307.07,1854.63 v1@307.07,1840.44 ; v7@301.76,2037.66 299.4,2040.02 299.4,2203.15 290.02,2212.53 290.02,2237.15 301.76,2248.89 301.76,2272.44 318.34,2289.03 318.34,2299.87 330.34,2311.86 330.33,2321.95 v1@343.72,2335.34
  other v1: 302.9,1835.72 346.92,2335.34
  other v7: 300.6,2037.66
DRAM_A8: U1.AB13 U3.T8 U5.T8 | length 1822.4
  Top Layer w4.7: U1.AB13@1116.05,2005.95 1132.41,1989.59 1154.58,1989.59 1162.66,1997.67 v1(1162.66,2052.35)
  Top Layer w5: v1@289.46,2160.43 U3.T8@330.03,2160.43 ; v1@292.02,1630.43 U5.T8@333.03,1630.43
  L6_INT_2 w4.5: 284.62,1939.91 284.62,2043.26 311.05,2069.69 349.11,2069.69 377.45,2098.03 440.63,2098.03 459.69,2078.97 485.79,2078.97 510.82,2104 780.84,2104 780.92,2104.08 807.47,2104.08 817.93,2093.62 888.1,2093.62 910.68,2071.04 ; v7(285.02,1925.71) 285.02,1939.51 ; 910.89,2071.04 926.89,2055.04 ; 927.18,2054.75 942.45,2039.48 1010.6,2039.48 1030.07,2058.95 1048.19,2058.95 1059.33,2070.09 1108.43,2070.09 1116.19,2062.33 1116.19,2047.02 1126.32,2036.89 1136.86,2036.89 ; 1137.02,2036.73 1147.04,2036.73 v1(1162.66,2052.35)
  Bottom Layer w4.7: 284.59,1634.29 v1(284.59,2159.65)
  other v1: 292.02,1631.45
DRAM_A9: U1.AE12 U3.R3 U5.R3 | length 1543
  Top Layer w4.7: v1(947.82,2067.88) 949.47,2067.88 949.47,2063.99 975.2,2038.26 988.34,2038.26 988.43,2038.17 1010.67,2038.17 1010.76,2038.26 1020.75,2038.26 U1.AE12@1021.57,2037.44
  Top Layer w5: v1(314.12,1802.61) 349.82,1802.61 U5.R3@364.53,1787.91 ; v1@355.17,2298.77 355.17,2311.55 U3.R3@361.53,2317.91
  L6_INT_2 w4.5: v7@330.87,2098.78 v7(330.87,2095.25) ; v7@332.09,2094.03 v7(330.87,2095.25) ; 773.28,2122.46 750.41,2122.46 724.03,2148.84 724.03,2176.07 708.36,2191.74 539.55,2191.74 519.57,2171.76 519.57,2138.78 478.16,2097.37 467.32,2097.37 457.59,2107.1 445.53,2119.15 354.77,2119.15 v7(330.87,2095.25) ; 773.3,2122.48 814.69,2122.48 ; 814.71,2122.5 815.07,2122.5 825.55,2112.02 895.73,2112.02 918.31,2089.44 928.98,2089.44 v1@949.92,2068.49
  Bottom Layer w5: v1@317.32,1805.81 317.32,1949.66 305.22,1961.76 305.22,2019.83 316.62,2031.23 316.62,2062.7 331.35,2077.43 331.35,2123.12 321.09,2133.38 321.09,2209.62 317.81,2212.9 306.72,2212.9 302.02,2217.6 302.02,2228.48 306.87,2233.33 329.99,2233.33 333.34,2236.68 333.34,2243.52 330.22,2246.64 321.46,2246.64 316.51,2251.59 316.51,2259.23 322.09,2264.81 334.36,2264.81 338.13,2268.58 338.13,2276.33 329.7,2284.76 329.7,2293.76 333.57,2297.63 351.1,2297.63 v1(353.7,2295.03)
DRAM_A10: U1.AA15 U3.L7 U5.L7 | length 1601
  Top Layer w4.5: v1(511.23,1965.05) 554.42,1965.05 566.75,1952.72 ; v1@1132.06,1896.58 1132.06,1927.47 U1.AA15@1147.55,1942.96
  Top Layer w4.7: U3.L7@487.51,2191.92 v1@499.32,2203.73 ; U5.L7@490.51,1660.19 U5.L7@490.51,1661.92 v1@490.51,1684.18 ; 566.75,1952.72 698.69,1952.72 701.63,1955.66 701.63,1969.78 704.57,1972.72 713.39,1972.72 716.33,1969.78 716.33,1955.66 719.27,1952.72 728.09,1952.72 731.03,1955.66 731.03,1969.78 733.97,1972.72 742.79,1972.72 745.73,1969.78 745.73,1955.66 748.67,1952.72 757.49,1952.72 760.43,1955.66 760.43,1969.78 763.37,1972.72 772.19,1972.72 775.13,1969.78 775.13,1955.66 778.07,1952.72 786.89,1952.72 789.83,1955.66 789.83,1969.78 792.77,1972.72 801.59,1972.72 804.53,1969.78 804.53,1955.66 807.47,1952.72 813.24,1952.72 ; 813.25,1952.73 842.61,1952.73 862.6,1972.72 871.42,1972.72 874.36,1969.78 874.36,1955.66 877.3,1952.72 896.44,1952.72 909.95,1939.21 909.95,1935.05 899.97,1925.07 899.97,1920.91 906.21,1914.67 910.36,1914.67 922.43,1926.73 931.43,1935.74 935.59,1935.74 941.83,1929.5 941.83,1925.34 934.9,1918.42 934.9,1914.26 942.29,1906.87 959.97,1906.87 v1@985.42,1881.42
  L3_INT_1 w4.5: v1(489.23,1685.46) 476.31,1698.38 476.31,1808.76 470.05,1815.02 470.05,1849.65 484.86,1864.46 493.06,1872.63 493.06,1884.19 487.46,1889.79 487.46,1943.43 v1@509.04,1965.01 ; v1@497.25,2202.04 497.25,2187.53 499.93,2184.85 508.05,2184.85 510.18,2182.72 510.18,2169.1 506.79,2165.71 499.42,2165.71 488.65,2176.48 481.76,2176.48 472.88,2167.6 472.88,2162.12 476.37,2158.63 484.5,2158.63 487.93,2155.2 487.93,2136.77 493.4,2131.3 493.4,2120.84 487.93,2115.37 487.93,2109.81 502.25,2095.49 502.25,2015.53 519.62,1998.16 519.62,1973.44 v1(511.23,1965.05)
  Bottom Layer w4.7: v1@989.5,1881.54 1094.14,1881.54 ; 1094.36,1881.32 1116.8,1881.32 v1(1131.27,1895.79)
  other v1: 984.57,1880.28 500.8,2205.59
DRAM_A11: U1.AC12 U3.R7 U5.R7 | length 1626.7
  Top Layer w4: 1059.04,2021.76 1074.72,2037.44 U1.AC12@1084.56,2037.44
  Top Layer w4.7: v7(329.08,2014.31) 350.92,1992.47 401.92,1992.47 429.19,2019.74 499.22,2019.74 532.14,1986.82 550.01,1986.82 557.45,1994.26 569.09,1994.26 576.53,1986.82 624.32,1986.82 635.71,1998.21 635.71,2025.96 644.82,2035.07 683.98,2035.07 703.16,2015.89 759.6,2015.89 815.87,2072.16 922.34,2072.16 972.74,2021.76 1059.04,2021.76 1062.3,2025.02 ; U3.R7@361.53,2191.92 v1@361.53,2212.97 ; v1(362,1686.06) 362,1664.45 U5.R7@364.53,1661.92
  Bottom Layer w4.7: v1@361.38,1685.45 346.36,1700.47 346.36,1950 329.08,1967.28 v7(329.08,2014.31) 335.88,2021.11 335.88,2047.48 329.08,2054.28 329.08,2061.44 346.36,2078.72 346.36,2123.05 331.99,2137.42 331.99,2192.94 342.92,2203.87 342.92,2226.68 350.16,2233.92 350.16,2243.19 342.92,2250.43 342.92,2257.91 347.33,2262.32 359.83,2262.32 364.14,2258.01 364.14,2215.82 v1(361.85,2213.53)
DRAM_A12: U1.AD12 U3.N7 U5.N7 | length 1548.3
  Top Layer w4.5: U3.N7@424.52,2191.92 v1@424.52,2252.66 ; U5.N7@427.52,1661.92 v1@441.98,1676.39 ; v1@1002.33,2051.09 1007.55,2056.31 1011.41,2052.45 1038.06,2052.45 U1.AD12@1053.06,2037.44
  L3_INT_1 w4.5: v1@425.6,2251.58 425.6,2140.84 407.79,2123.03 407.79,1997.14 v1(433.92,1971.01) 433.92,1895.65 422.36,1884.09 422.36,1859.18 436.71,1844.83 436.71,1802 ; 436.79,1801.92 436.79,1750.38 415.96,1729.55 415.96,1709.04 v1@441.98,1683.02
  L6_INT_2 w4.5: v1(433.92,1971.01) 421.66,1971.01 418.45,1974.22 418.45,1988.35 439.12,2009.02 ; 439.12,2009.42 459.25,2029.55 507.49,2029.55 532.01,2054.07 681.14,2054.07 687.21,2048 768.62,2048 771.52,2045.1 771.52,2027.35 774.42,2024.45 783.12,2024.45 786.02,2027.35 786.02,2045.1 788.92,2048 797.62,2048 800.52,2045.1 800.52,2027.35 803.42,2024.45 812.12,2024.45 815.02,2027.35 815.02,2045.1 817.14,2047.22 859.42,2047.22 863.77,2042.87 863.77,2033.7 871.05,2026.42 880.22,2026.42 v1@924.28,1982.36
  Bottom Layer w4.5: v1(928.8,1982.01) 928.8,1995.67 963.74,2030.61 976.06,2030.61 986.21,2040.77 986.35,2040.77
  Bottom Layer w4.7: 986.35,2040.77 986.35,2040.92 997.65,2052.22 1000.41,2052.22 v1@1000.41,2054.16
  other v1: 441.98,1680.5 1003.7,2054.7 423.34,2253.84
DRAM_A13: U1.AC17 U3.T3 U5.T3 | length 1676.7
  Top Layer w4.5: U1.AC17@1084.56,1879.96 1084.56,1879.37 v7(1100.02,1863.91)
  Top Layer w5: v1@309.13,2317.91 U3.T3@330.03,2317.91 ; v1@309.5,1777.21 322.33,1777.21 U5.T3@333.03,1787.91
  L3_INT_1 w4.5: v1(308.14,2317.94) 338.83,2287.25 338.83,2185.03 361.32,2162.54 v7@361.32,2028.36 ; v1(309.06,1777.12) 323.79,1762.39 343.64,1762.39 356.77,1775.52 356.77,1902.64 339.8,1919.61 339.8,2003.89 362.27,2026.36 v7(362.27,2028.36)
  L6_INT_2 w4.5: v7@364.51,2026.12 331.15,1992.76 331.15,1916.63 385.48,1862.3 547.65,1862.3 554.96,1854.99 637.7,1854.99 663.66,1880.95 664.97,1880.95 672.38,1888.36 773.73,1888.36 792.57,1907.2 842.99,1907.2 875.48,1874.71 922.02,1874.71 940.19,1856.54 1059,1856.54 1062.15,1853.39 1078.07,1853.39 ; 1078.17,1853.29 1087.38,1853.29 v7@1099.01,1864.92
DRAM_A14: U1.AA12 U3.T7 U5.T7 | length 1804.9
  Top Layer w4.5: v1(1133.05,2054) 1147.55,2039.5 U1.AA12@1147.55,2037.44
  Top Layer w5: v1(268.44,2192.19) 268.71,2191.92 U3.T7@330.03,2191.92 288.33,2191.92 ; v1@269.82,1665.42 273.32,1661.92 U5.T7@333.03,1661.92
  L6_INT_2 w4.5: v7(266.55,1958.25) 266.55,2038.2 307.77,2079.42 344.27,2079.42 374.68,2109.83 441.84,2109.83 463.5,2088.17 481.97,2088.17 507,2113.2 777.03,2113.2 777.11,2113.28 811.28,2113.28 821.74,2102.82 891.92,2102.82 914.5,2080.24 914.71,2080.24 930.71,2064.24 930.96,2064.24 945.27,2049.93 980.47,2049.93 989.19,2058.65 989.19,2065.05 993.33,2069.19 1043.81,2069.19 1053.16,2078.54 1053.16,2090.57 1061.6,2099.01 1109.97,2099.01 1117.18,2091.8 1117.18,2080.43 1133.05,2064.56 v1(1133.05,2054)
  Bottom Layer w4.7: 264.66,1670.67 v1@264.66,2191.79
  Bottom Layer w5: 264.66,1670.67 270.68,1664.65 v1(270.4,1664.65)
DRAM_A15: U1.Y12 U3.M7 U5.M7 | length 1517.8
  Top Layer w4.7: U1.Y12@1179.05,2037.44 1179.05,2038.06 v1(1193.89,2052.9)
  Top Layer w5: U3.M7@456.01,2191.92 456.01,2195.93 v1@465.42,2205.34 ; U5.M7@459.01,1661.92 459.01,1676.98 v1(466.01,1683.98)
  L3_INT_1 w4.7: v1(1037.99,1989.03) 1056.78,1970.24 1125.11,1970.24 1179.78,2024.91 1179.78,2029.51 1190.6,2040.33 v1@1190.6,2052.9
  L3_INT_1 w5: v1@464.15,1978.25 464.15,2006 448.7,2021.45 448.7,2182.5 453.1,2186.9 453.1,2205.18 450.01,2208.27 450.01,2222 454.59,2226.58 466.31,2226.58 469.72,2223.17 v1(469.72,2206.61) ; v1(466.19,1976.21) 464.9,1974.92 464.9,1859.43 460.6,1855.13 460.6,1810.49 466.75,1804.34 v1@466.75,1684.72
  L6_INT_2 w4.5: v1@464.51,1976.21 464.51,2013.39 471.47,2020.35 511.3,2020.35 535.82,2044.87 674.57,2044.87 704.19,2015.25 868.54,2015.25 915.75,1968.04 942.66,1968.04 949.99,1975.37 1017.61,1975.37 v1@1033.11,1990.86
DRAM_CAS_B: U1.AE16 U3.K3 U5.K3 | length 1499.3
  Top Layer w4.7: U3.K3@519.01,2317.91 v7@533.17,2332.07 ; v7@522.01,1765.21 U5.K3@522.01,1787.91 ; v1(563.27,1980.21) 576.86,1966.62 590.2,1966.62 599.14,1975.56 622.16,1975.56 631.1,1966.62 683.18,1966.62 703.43,1986.87 811.23,1986.87 815.5,1982.6 815.5,1965.07 818.44,1962.13 827.26,1962.13 830.2,1965.07 830.2,1982.44 834.63,1986.87 906.15,1986.87 911.26,1981.76 911.26,1969.2 904.34,1962.27 904.34,1958.12 910.57,1951.88 914.73,1951.88 923.74,1960.88 930.98,1968.13 935.14,1968.13 941.38,1961.9 941.38,1957.74 936.21,1952.57 936.21,1948.41 942.45,1942.17 946.6,1942.17 958.13,1953.7 962.29,1953.7 968.52,1947.46 968.52,1943.3 957,1931.78 957,1922.28 963.01,1916.27 972.08,1916.27 982.62,1926.81 982.62,1933.87 985.89,1937.14 994.92,1937.14 1000.6,1931.46 1000.6,1923.44 988.91,1911.75 988.91,1900.75 993.14,1896.52 1001.61,1896.52 1016.55,1911.46 U1.AE16@1021.57,1911.46
  L3_INT_1 w4.7: v7(521.69,1763.32) 521.69,1749.65 526.13,1745.2 526.13,1725.41 534.91,1716.64 559.15,1716.64 576.7,1734.19 576.7,1766.16 564.97,1777.89 564.97,1848.31 542.76,1870.52 542.76,1882.98 564.24,1904.46 564.24,1957.36 564.02,1957.58 564.02,2000.99 573.61,2010.58 573.61,2051.99 540.78,2084.82 540.78,2327.16 v7(534.69,2333.25)
DRAM_CS0_B: U1.Y16 U3.L2 U5.L2 | length 1577.9
  Top Layer w4.5: v1@1164.43,1926.08 U1.Y16@1179.05,1911.46
  Top Layer w4.7: U3.L2@487.51,2349.4 488.3,2349.4 v1@502.84,2334.86 ; U5.L2@490.51,1819.4 v1@505.28,1834.17
  L3_INT_1 w4.5: v1(503.25,2333.64) 531.48,2305.41 531.48,2080.97 556.51,2055.94 556.51,2015.22 549.26,2007.97 549.26,1959.19 554.32,1954.13 554.32,1907.7 533.46,1886.84 533.46,1869.43 524.37,1860.34 524.37,1852.39 527.64,1849.12 547.19,1849.12 554.35,1841.96 554.35,1824.08 549.21,1818.94 532.32,1818.94 522.56,1809.18 522.56,1798.74 517.24,1793.42 509.84,1793.42 506.8,1796.46 506.8,1833.71 v1(505.56,1834.95)
  L6_INT_2 w4.5: v1(555.21,2013.39) 555.21,2012.7 564.41,2003.5 585.77,2003.5 613.2,1976.07 624.94,1976.07 633.76,1984.89 633.76,1990.61 639.44,1996.29 684.46,1996.29 684.59,1996.42 857.64,1996.42 904.42,1949.64 975.59,1949.64 v1@977.88,1951.93
  Bottom Layer w4.7: v1@978.21,1951.84 v1@978.21,1952.89 ; v1(981.92,1951.69) 981.52,1951.69 1021.43,1911.78 1028.75,1911.78 1031.69,1914.72 1031.69,1948.84 1034.63,1951.78 1043.45,1951.78 1046.39,1948.84 1046.39,1914.72 1049.33,1911.78 1058.15,1911.78 1061.09,1914.72 1061.09,1932.99 1065.38,1937.28 1072.49,1937.28 1075.79,1933.98 1075.79,1914.72 1078.73,1911.78 1116.95,1911.78 1119.89,1914.72 1119.89,1932.9 1124.35,1937.36 1130.01,1937.36 1134.59,1932.78 1134.59,1914.72 1137.53,1911.78 1147.38,1911.78 v1(1163.12,1927.52)
DRAM_D0: U1.AD2 U3.E3 | length 855.4
  Top Layer w4.7: U3.E3@676.49,2317.91 668.23,2317.91 662.63,2312.31 662.63,2301.13 674.76,2289 686.27,2289 690.94,2293.67 713.68,2293.67 716.62,2296.61 716.62,2300.73 719.56,2303.67 728.38,2303.67 731.32,2300.73 731.32,2296.61 734.26,2293.67 743.08,2293.67 746.02,2296.61 746.02,2300.73 748.96,2303.67 757.78,2303.67 760.72,2300.73 760.72,2296.61 763.66,2293.67 772.48,2293.67 775.42,2296.61 775.42,2300.73 778.36,2303.67 787.18,2303.67 790.12,2300.73 790.12,2296.61 793.06,2293.67 801.88,2293.67 804.82,2296.61 804.82,2300.73 807.76,2303.67 816.58,2303.67 819.52,2300.73 819.52,2296.61 822.46,2293.67 831.28,2293.67 834.22,2296.61 834.22,2300.73 837.16,2303.67 845.98,2303.67 848.92,2300.73 848.92,2296.61 851.86,2293.67 900.1,2293.67 905.85,2299.42 905.85,2414.32 913.08,2421.55 928.94,2421.55 936.55,2413.94 936.55,2390.46 ; 936.53,2390.44 936.53,2299.35 939.47,2296.41 948.29,2296.41 951.23,2299.35 951.23,2376.38 954.78,2379.93 962.03,2379.93 965.93,2376.03 965.93,2339.35 968.87,2336.41 1037.07,2336.41 U1.AD2@1053.06,2352.4
DRAM_D1: U1.AE2 U3.F8 | length 856.4
  Top Layer w4.5: v1@629.61,2171.2 634.22,2171.2 U3.F8@644.99,2160.43 ; v11@998.64,2352.4 U1.AE2@1021.57,2352.4
  L3_INT_1 w4.5: v1@629.95,2177.42 648.8,2196.27 648.8,2277.7 660.73,2289.63 677.05,2289.63 682.17,2284.51 682.17,2270.37 685.07,2267.47 693.77,2267.47 696.67,2270.37 696.67,2284.51 699.57,2287.41 708.27,2287.41 711.17,2284.51 711.17,2270.37 714.07,2267.47 722.77,2267.47 725.67,2270.37 725.67,2284.51 728.57,2287.41 737.27,2287.41 740.17,2284.51 740.17,2270.37 743.07,2267.47 751.77,2267.47 754.67,2270.37 754.67,2284.51 757.57,2287.41 766.27,2287.41 769.17,2284.51 769.17,2270.37 772.07,2267.47 780.77,2267.47 783.67,2270.37 783.67,2284.51 786.57,2287.41 795.27,2287.41 798.17,2284.51 798.17,2270.37 801.07,2267.47 809.77,2267.47 812.67,2270.37 812.67,2284.51 815.57,2287.41 824.27,2287.41 827.17,2284.51 827.17,2270.37 830.07,2267.47 838.77,2267.47 841.67,2270.37 841.67,2284.51 844.57,2287.41 853.27,2287.41 856.17,2284.51 856.17,2270.37 859.07,2267.47 867.77,2267.47 870.67,2270.37 870.67,2284.51 873.57,2287.41 882.27,2287.41 885.17,2284.51 885.17,2270.37 888.07,2267.47 898.93,2267.47 906.34,2274.88 906.34,2282.52 919.26,2295.44 926.9,2295.44 930.55,2299.09 934.65,2299.09 937.52,2296.21 941.63,2296.21 947.78,2302.37 947.78,2306.47 942.85,2311.39 937.93,2316.32 937.93,2320.42 944.08,2326.57 948.18,2326.57 953.11,2321.65 958.03,2316.72 962.13,2316.72 968.28,2322.87 968.28,2326.97 963.36,2331.9 958.43,2336.82 958.43,2340.93 964.58,2347.08 968.69,2347.08 971.56,2344.2 975.66,2344.2 983.91,2352.45 v11(998.64,2352.45)
  other v1: 629.74,2175.69
DRAM_D2: U1.AC4 U3.G2 | length 856.5
  Top Layer w4.5: v11(597.82,2365.21) 613.49,2349.54 U3.G2@613.49,2349.4
  Top Layer w4.7: U1.AC4@1084.56,2289.41 v7@1099.95,2304.8
  L3_INT_1 w4.5: v11(597.82,2365.21) 597.82,2411.23 627.55,2440.96 634.51,2440.96 653.36,2440.96 656.26,2438.06 656.26,2426.63 659.16,2423.73 667.86,2423.73 670.76,2426.63 670.76,2438.06 673.66,2440.96 682.36,2440.96 685.26,2438.06 685.26,2426.63 688.16,2423.73 696.86,2423.73 699.76,2426.63 699.76,2438.06 702.66,2440.96 711.36,2440.96 714.26,2438.06 714.26,2426.63 717.16,2423.73 725.86,2423.73 728.76,2426.63 728.76,2438.06 731.66,2440.96 740.36,2440.96 743.26,2438.06 743.26,2426.63 746.16,2423.73 754.86,2423.73 757.76,2426.63 757.76,2438.06 760.66,2440.96 769.36,2440.96 772.26,2438.06 772.26,2426.63 775.16,2423.73 783.86,2423.73 786.76,2426.63 786.76,2438.06 789.66,2440.96 1061.83,2440.96 1100.05,2402.74 v7(1100.05,2305.09)
DRAM_D3: U1.AA5 U3.H3 | length 856.2
  Top Layer w4.5: v11(566.22,2334.3) 566.22,2333.69 U3.H3@582,2317.91
  Top Layer w4.7: U1.AA5@1147.55,2257.92 1147.78,2257.92 v7@1161.34,2271.48
  L3_INT_1 w4.5: v11@566.68,2332.63 566.68,2404.74 619.08,2457.14 1059.29,2457.14 1112.66,2403.77 1112.66,2323.12 v7(1163.1,2272.68)
DRAM_D4: U1.AC1 U3.F2 | length 856.8
  Top Layer w4.5: v11(629.62,2364.36) 630.03,2364.36 U3.F2@644.99,2349.4 ; v11@1072.22,2407.91 1084.56,2395.57 U1.AC1@1084.56,2383.9
  L3_INT_1 w4.5: v11@629.4,2362.57 v11@629.62,2362.57 ; v11(629.62,2364.36) 629.62,2398.38 644.45,2413.21 819.58,2413.21 822.48,2416.11 822.48,2428.74 825.38,2431.64 834.08,2431.64 836.98,2428.74 836.98,2396.43 839.88,2393.53 848.58,2393.53 851.48,2396.43 851.48,2428.74 854.38,2431.64 863.08,2431.64 865.98,2428.74 865.98,2396.43 868.88,2393.53 877.58,2393.53 880.48,2396.43 880.48,2428.74 883.38,2431.64 892.08,2431.64 894.98,2428.74 894.98,2396.43 897.88,2393.53 906.58,2393.53 909.48,2396.43 909.48,2428.74 912.38,2431.64 921.08,2431.64 923.98,2428.74 923.98,2396.43 926.88,2393.53 935.58,2393.53 938.48,2396.43 938.48,2428.74 941.38,2431.64 950.08,2431.64 952.98,2428.74 952.98,2416.11 955.88,2413.21 990.72,2413.21 1008.28,2430.77 1047.8,2430.77 v11(1070.83,2407.74)
DRAM_D5: U1.AD1 U3.F7 | length 856.8
  Top Layer w4.5: v1(630.31,2209) 644.99,2194.32 U3.F7@644.99,2191.92 ; v11@1037.23,2368.07 U1.AD1@1053.06,2383.9
  L3_INT_1 w4.5: v1(630.31,2209) 628.2,2211.11 628.2,2333.86 645.64,2351.3 645.64,2368.33 655.81,2378.5 658.72,2378.5 663.07,2378.5 665.97,2381.4 665.97,2385.87 668.87,2388.77 677.57,2388.77 680.47,2385.87 680.47,2381.4 683.37,2378.5 704.25,2378.5 854.81,2378.5 859.62,2373.69 859.62,2359.49 862.52,2356.59 871.22,2356.59 874.12,2359.49 874.12,2373.69 877.02,2376.59 885.72,2376.59 888.62,2373.69 888.62,2359.49 891.52,2356.59 900.22,2356.59 903.12,2359.49 903.12,2373.69 906.02,2376.59 914.72,2376.59 917.62,2373.69 917.62,2359.49 920.52,2356.59 929.22,2356.59 932.12,2359.49 932.12,2373.69 935.02,2376.59 943.72,2376.59 946.62,2373.69 946.62,2359.49 949.52,2356.59 958.22,2356.59 961.12,2359.49 961.12,2393.69 964.02,2396.59 972.72,2396.59 975.62,2393.69 975.62,2366.2 978.52,2363.3 987.22,2363.3 990.12,2366.2 990.12,2393.69 993.02,2396.59 1001.72,2396.59 1004.62,2393.69 1004.62,2379.49 1007.52,2376.59 1028.71,2376.59 v11(1037.76,2367.54)
DRAM_D6: U1.AB4 U3.H7 | length 856.6
  Top Layer w4.5: U3.H7@582,2191.92 582,2191.64 v1(597.49,2176.15) ; U1.AB4@1116.05,2289.41 v7@1130.44,2275.03
  L3_INT_1 w4.5: v1@597.29,2180.33 597.29,2174.33 615.58,2156.04 646.97,2156.04 650.94,2160.01 707.66,2160.01 707.92,2160.27 847.54,2160.27 852.93,2165.66 852.93,2169.76 844.81,2177.87 844.81,2181.97 850.96,2188.13 855.06,2188.13 865.23,2177.96 875.4,2167.79 879.5,2167.79 885.65,2173.95 885.65,2178.05 865.32,2198.38 865.32,2202.48 871.47,2208.63 875.57,2208.63 885.74,2198.47 895.9,2188.3 900,2188.3 906.15,2194.45 906.15,2198.55 886.44,2218.26 886.44,2222.36 892.6,2228.52 896.7,2228.52 906.24,2218.97 916.41,2208.81 920.51,2208.81 926.66,2214.96 926.66,2219.06 918.55,2227.17 918.55,2231.28 1004.19,2316.92 1032.25,2316.92 1074.89,2274.28 v7(1131.71,2274.28)
DRAM_D7: U1.AE4 U3.H8 | length 856.9
  Top Layer w4.5: U3.H8@582,2160.43 v1@597.13,2145.3 ; v11(997.04,2285.92) 1000.53,2289.41 U1.AE4@1021.57,2289.41
  L3_INT_1 w4.5: v1(597.01,2144.63) 616.5,2125.14 862.06,2125.14 873.84,2136.92 873.84,2142.53 868.73,2147.65 868.73,2151.75 874.88,2157.9 878.98,2157.9 890.63,2146.25 902.28,2134.6 906.38,2134.6 912.53,2140.75 912.53,2144.85 900.88,2156.5 893.33,2164.06 893.33,2168.16 899.48,2174.31 903.58,2174.31 911.14,2166.76 922.79,2155.11 926.89,2155.11 933.04,2161.26 933.04,2165.36 921.39,2177.01 913.83,2184.56 913.83,2188.66 919.99,2194.82 924.09,2194.82 931.64,2187.26 943.29,2175.61 947.39,2175.61 953.55,2181.76 953.55,2185.86 941.89,2197.51 934.34,2205.07 934.34,2209.17 940.49,2215.32 944.59,2215.32 952.15,2207.77 963.8,2196.12 967.9,2196.12 974.05,2202.27 974.05,2206.37 950.75,2229.67 950.75,2233.77 956.9,2239.92 961,2239.92 972.65,2228.27 984.3,2216.62 988.41,2216.62 993.7,2221.92 993.7,2227.73 978.32,2243.11 978.32,2267.2 v11@994.89,2283.77 ; v11@994.89,2287.04 v11@994.89,2283.77 ; v11(997.04,2285.92) v11@994.89,2283.77
DRAM_D8: U1.AD5 U3.D7 | length 826.9
  Top Layer w4.5: U3.D7@707.98,2191.92 708.8,2192.74 v11(708.8,2214.46) ; v7@1038.85,2272.69 1053.06,2258.48 U1.AD5@1053.06,2257.92
  L6_INT_2 w4.5: v11(708.8,2214.46) 731.61,2237.27 741.15,2237.27 746.29,2242.41 746.29,2259.16 749.03,2261.9 757.25,2261.9 759.99,2259.16 759.99,2225.54 762.09,2223.44 771.59,2223.44 773.69,2225.54 773.69,2259.16 776.43,2261.9 784.65,2261.9 787.39,2259.16 787.39,2225.54 790.13,2222.8 798.35,2222.8 801.09,2225.54 801.09,2259.16 803.83,2261.9 812.05,2261.9 814.79,2259.16 814.79,2225.54 817.53,2222.8 825.75,2222.8 828.49,2225.54 828.49,2259.16 831.23,2261.9 839.45,2261.9 842.19,2259.16 842.19,2225.54 844.93,2222.8 853.15,2222.8 855.89,2225.54 855.89,2259.16 858.63,2261.9 866.85,2261.9 869.59,2259.16 869.59,2225.54 872.33,2222.8 880.55,2222.8 883.29,2225.54 883.29,2259.16 886.03,2261.9 894.25,2261.9 896.99,2259.16 896.99,2225.54 899.73,2222.8 907.95,2222.8 910.69,2225.54 910.69,2239.44 913.6,2242.35 948.84,2242.35 977.08,2270.59 990.66,2270.59 ; 990.68,2270.57 1035.19,2270.57 v7(1038.91,2274.29)
DRAM_D9: U1.AE5 U3.A7 | length 827.7
  Top Layer w4.5: U3.A7@802.47,2191.92 824.62,2191.92 826.59,2193.89 824.2,2196.28 v1(822.85,2196.28) ; v11@1006.16,2257.92 U1.AE5@1021.57,2257.92
  L6_INT_2 w4.5: v1(822.85,2196.28) 824.2,2196.28 826.59,2193.89 790.09,2193.89 783.36,2200.62 783.36,2207.96 789.29,2213.89 854.95,2213.89 857.85,2210.99 857.85,2176.79 860.75,2173.89 869.45,2173.89 872.35,2176.79 872.35,2210.99 875.25,2213.89 883.95,2213.89 886.85,2210.99 886.85,2176.79 889.75,2173.89 898.45,2173.89 901.35,2176.79 901.35,2210.99 904.25,2213.89 912.95,2213.89 915.85,2210.99 915.85,2176.79 918.75,2173.89 927.45,2173.89 930.35,2176.79 930.35,2229.42 934.38,2233.45 940.91,2233.45 944.85,2229.51 944.85,2176.79 947.75,2173.89 956.45,2173.89 959.35,2176.79 ; 959.35,2208.27 959.35,2176.79 ; v11(997.83,2254.8) 998.09,2254.54 998.09,2202.78 992.61,2197.3 979.56,2197.3 973.85,2203.01 973.85,2220.79 985.01,2231.95 985.01,2241.61 978.06,2248.56 968.28,2248.56 959.35,2239.63 959.35,2176.79
DRAM_D10: U1.AA6 U3.C2 | length 827.3
  Top Layer w4.5: U3.C2@739.48,2349.4 740.23,2349.4 v7(754.58,2363.75) ; v11@1134.28,2239.69 U1.AA6@1147.55,2226.42
  L6_INT_2 w4.5: v7@756,2364.39 756,2422.16 774.29,2440.45 780.58,2440.45 787.83,2440.45 799.43,2440.45 802.33,2437.55 802.33,2423.76 805.23,2420.86 813.93,2420.86 816.83,2423.76 816.83,2437.55 819.73,2440.45 828.43,2440.45 831.33,2437.55 831.33,2423.76 834.23,2420.86 842.93,2420.86 845.83,2423.76 845.83,2437.55 848.73,2440.45 857.43,2440.45 860.33,2437.55 860.33,2423.76 863.23,2420.86 871.93,2420.86 874.83,2423.76 874.83,2437.55 877.73,2440.45 886.43,2440.45 889.33,2437.55 889.33,2423.76 892.23,2420.86 900.93,2420.86 903.83,2423.76 903.83,2437.55 906.73,2440.45 915.43,2440.45 918.33,2437.55 918.33,2423.76 921.23,2420.86 929.93,2420.86 932.83,2423.76 932.83,2437.55 935.73,2440.45 975.71,2440.45 1085.03,2440.45 1148.12,2377.36 1148.12,2265.15 1132.31,2249.34 v11(1132.31,2241.89)
DRAM_D11: U1.AE7 U3.B8 | length 827.5
  Top Layer w4.5: U3.B8@770.97,2160.43 770.97,2160.58 v7(786.71,2176.32) ; v7@1005.01,2183.65 1016.28,2194.92 U1.AE7@1021.57,2194.92
  L6_INT_2 w4.5: v7@786.92,2175.29 787.74,2175.29 v7(786.71,2176.32) 797.03,2176.32 802.51,2181.8 809.66,2181.8 812.73,2178.73 812.73,2171.88 803.12,2162.27 803.12,2159.91 811.32,2151.71 815.42,2151.71 824.58,2160.87 828.68,2160.87 834.84,2154.72 834.84,2150.61 825.68,2141.45 825.68,2137.35 832.07,2130.96 863.36,2130.96 870.45,2138.06 870.45,2158.79 874.05,2162.38 882.4,2162.38 885.89,2158.89 885.89,2137.42 889.07,2134.24 896.5,2134.24 899.26,2137 899.26,2162.79 902.16,2165.69 910.86,2165.69 913.76,2162.79 913.76,2128.93 916.66,2126.03 925.36,2126.03 928.26,2128.93 928.26,2162.79 931.16,2165.69 939.86,2165.69 942.76,2162.79 942.76,2128.93 945.66,2126.03 954.36,2126.03 957.26,2128.93 957.26,2162.79 960.16,2165.69 968.86,2165.69 971.76,2162.79 971.76,2134.73 975.66,2130.83 983.29,2130.83 986.24,2133.78 986.24,2144.31 989.4,2147.47 995.02,2147.47 999.96,2142.53 1000.17,2142.53 1009.62,2133.08 1017.96,2133.08 1023.01,2138.13 1023.01,2184.99 1042.4,2204.38 1042.4,2224.32 1026.83,2239.89 1015.9,2239.89 1010.39,2234.38 1010.39,2189.42 v7(1001.78,2180.81)
DRAM_D12: U1.AB5 U3.A2 | length 827.3
  Top Layer w4.5: U3.A2@802.47,2349.4 813.54,2349.4 v7(823.91,2359.77) ; v7@1102.29,2244.15 U1.AB5@1116.05,2257.92
  L6_INT_2 w4.5: v7@823.3,2360.04 823.81,2360.04 850.09,2386.32 861.5,2386.32 865.85,2386.32 868.75,2389.22 868.75,2402.01 871.65,2404.91 880.35,2404.91 883.25,2402.01 883.25,2386.32 883.25,2370.63 886.15,2367.73 894.85,2367.73 897.75,2370.63 897.75,2386.32 897.75,2402.01 900.65,2404.91 909.35,2404.91 912.25,2402.01 912.25,2386.32 912.25,2370.63 915.15,2367.73 923.85,2367.73 926.75,2370.63 926.75,2386.32 926.75,2402.01 929.65,2404.91 938.35,2404.91 941.25,2402.01 941.25,2386.32 941.25,2370.63 944.15,2367.73 952.85,2367.73 955.75,2370.63 955.75,2386.32 955.75,2402.01 958.65,2404.91 967.35,2404.91 970.25,2402.01 970.25,2386.32 970.25,2370.63 973.15,2367.73 981.85,2367.73 984.75,2370.63 984.75,2383.42 987.65,2386.32 993.22,2386.32 1035.43,2386.32 1044,2394.89 1044,2412.82 1057.38,2426.2 1082.52,2426.2 1132.86,2375.86 1132.86,2303.25 1100.1,2270.49 v7(1100.1,2242.44)
DRAM_D13: U1.AC5 U3.A3 | length 827.6
  Top Layer w4.5: U3.A3@802.47,2317.91 824.66,2317.91 v7(825.94,2319.19) ; v7@1069.19,2242.55 U1.AC5@1084.56,2257.92
  L6_INT_2 w4.5: v7@823.86,2319.07 v7@824.96,2320.17 ; v7(825.94,2319.19) 833.71,2326.96 857.75,2326.96 860.65,2329.86 860.65,2344.06 863.55,2346.96 872.25,2346.96 875.15,2344.06 875.15,2320.8 878.05,2317.9 886.75,2317.9 889.65,2320.8 889.65,2344.06 892.55,2346.96 901.25,2346.96 904.15,2344.06 904.15,2320.8 907.05,2317.9 915.75,2317.9 918.65,2320.8 918.65,2344.06 921.55,2346.96 930.25,2346.96 933.15,2344.06 933.15,2320.8 936.05,2317.9 944.75,2317.9 947.65,2320.8 947.65,2344.06 950.55,2346.96 959.25,2346.96 962.15,2344.06 962.15,2320.8 965.05,2317.9 973.75,2317.9 976.65,2320.8 976.65,2337.72 979.55,2340.62 988.25,2340.62 991.15,2337.72 991.15,2320.8 994.05,2317.9 1002.75,2317.9 1005.65,2320.8 1005.65,2329.64 1018.19,2342.18 1018.19,2348.3 1021.7,2351.81 1027.49,2351.81 1031.11,2348.19 1031.11,2325.29 1034.29,2322.11 1044.26,2322.11 1047.78,2325.63 1047.78,2345.86 1056.28,2354.36 1079.43,2354.36 1089.11,2364.04 1089.11,2376.75 1096.78,2384.42 1106.05,2384.42 1118.92,2371.55 1118.92,2349.47 1083.81,2314.36 1083.81,2257.84 v7(1068.27,2242.3)